# EAGLE board microzed_sd_v0.3 (EAGLE 6.5.4)
REVISION: R1.0; VERSION: V0.3
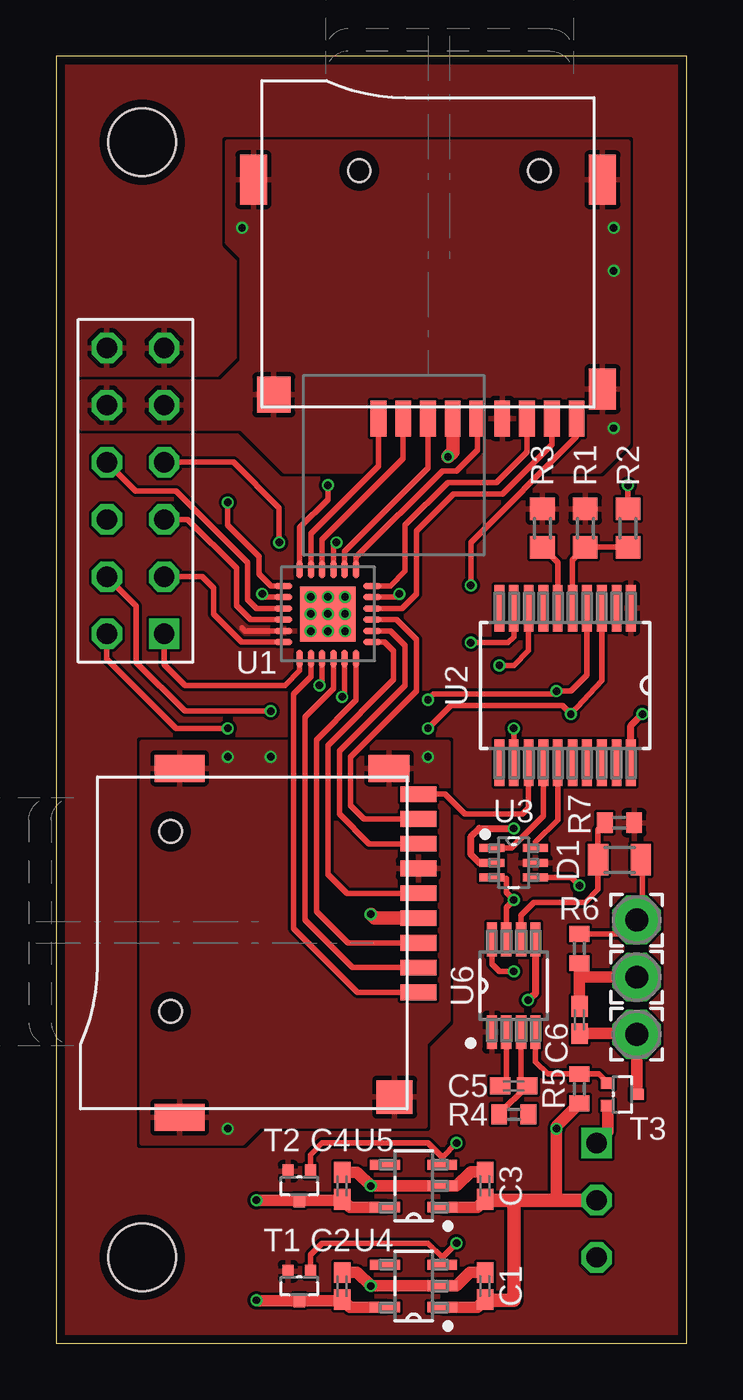
[diagram p0: board, top side]
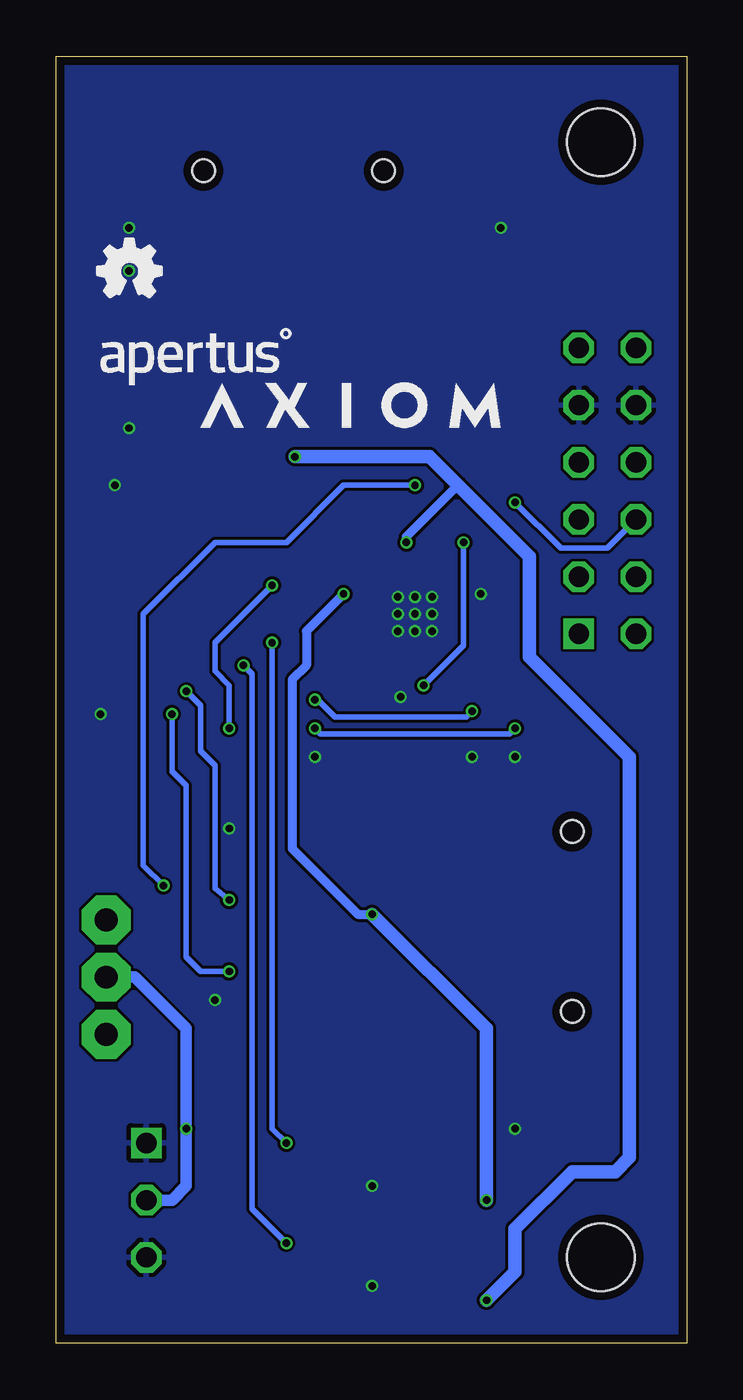
[diagram p1: board, bottom side, seen from below]

Size 28 x 57.15 mm. Coordinates in mm from the lower left corner, seen from the top.
Outline: 0,0 28,0 28,57.15 0,57.15 0,0
Copper layers (1+2*15+16): Top 0.035559375mm / dielectric 0.17018125mm / Route2 0.01778125mm / dielectric 47mil / Route15 0.0356mm / dielectric 0.2007mm / Bottom 0.0356mm
Design rules "LaenPCBOrder4L *": minimum track width 5mil, minimum drill 10mil, track to track 5mil, track to pad 5mil, pad to pad 5mil, via to via 5mil, smd to smd 5mil, copper to edge 15mil, drill to drill 5mil, minimum pad ring 4mil, minimum via ring 4mil, stop-mask expansion 4mil, vias tented up to drill 15mil, thermal gap 8mil
Net classes: 1 LVDS: width 0.305 mm, drill 0.305 mm, clearance 0.152 mm
Holes 3 mm at 3.81,3.81 3.81,53.34
tKeepout: area 1.3,1.3 to 6.3,6.3; area 1.3,50.8 to 6.3,55.8

## Footprints (pad centres in the part's own frame; a part is rotated, then mirrored left to right if it is on the bottom)
C0402K = smd 0.925 x 0.74: 1 -0.6,0; 2 0.6,0
MICROMELF-W = smd 0.9 x 1.4: A 0.95,0; C -0.95,0
2,15/1,0 = drill 1.016 pad 2.159 octagon: 1 0,0
R0603 = smd 1 x 1.1: 1 -0.85,0; 2 0.85,0
R0402 = smd 0.7 x 0.9: 1 -0.65,0; 2 0.65,0
SOT416 = smd 0.5 x 0.6: 1 -0.5,-0.65; 2 0.5,-0.65; 3 0,0.65
µZ-TOP-NOHOLES = drill 0.9 square: J5-1 4.79,31.5; JP4-1 24,8.89 | drill 0.9 octagon: J5-2 4.79,34.04; J5-3 4.79,36.58; J5-4 4.79,39.12; J5-5 4.79,41.66; J5-6 4.79,44.2; J5-7 2.25,31.5; J5-8 2.25,34.04; J5-9 2.25,36.58; J5-10 2.25,39.12; J5-11 2.25,41.66; J5-12 2.25,44.2; JP4-2 24,6.35; JP4-3 24,3.81
S-PWQFN-N24 = smd 0.78 x 0.28: 1 -1.975,1.25; 2 -1.975,0.75; 3 -1.975,0.25; 4 -1.975,-0.25; 5 -1.975,-0.75; 6 -1.975,-1.25; 13 1.975,-1.25; 14 1.975,-0.75; 15 1.975,-0.25; 16 1.975,0.25; 17 1.975,0.75; 18 1.975,1.25 | smd 0.28 x 0.78: 7 -1.25,-1.975; 8 -0.75,-1.975; 9 -0.25,-1.975; 10 0.25,-1.975; 11 0.75,-1.975; 12 1.25,-1.975; 19 1.25,1.975; 20 0.75,1.975; 21 0.25,1.975; 22 -0.25,1.975; 23 -0.75,1.975; 24 -1.25,1.975 | smd 2.45 x 2.45: EPAD 0,0
SOP65P780X200-20N = smd 2.057 x 0.432: 1 -3.429,2.921; 2 -3.429,2.286; 3 -3.429,1.626; 4 -3.429,0.965; 5 -3.429,0.33; 6 -3.429,-0.33; 7 -3.429,-0.965; 8 -3.429,-1.626; 9 -3.429,-2.286; 10 -3.429,-2.921; 11 3.429,-2.921; 12 3.429,-2.286; 13 3.429,-1.626; 14 3.429,-0.965; 15 3.429,-0.33; 16 3.429,0.33; 17 3.429,0.965; 18 3.429,1.626; 19 3.429,2.286; 20 3.429,2.921
SOT65P210X110-6N = smd 1.118 x 0.356: 1 -0.965,0.66; 2 -0.965,0; 3 -0.965,-0.66; 4 0.965,-0.66; 5 0.965,0; 6 0.965,0.66
SOT95P275X110-5N = smd 1.321 x 0.457: 1 -1.27,0.94; 2 -1.27,0; 3 -1.27,-0.94; 4 1.27,-0.94; 5 1.27,0.94
SOP65P490X110-8N = smd 1.499 x 0.457: 1 -2.057,0.965; 2 -2.057,0.33; 3 -2.057,-0.33; 4 -2.057,-0.965; 5 2.057,-0.965; 6 2.057,-0.33; 7 2.057,0.33; 8 2.057,0.965
TF-MICRO-SD_PP3 = smd 0.7 x 1.6: 1 2.2,11; 2 1.1,11; 3 0,11; 4 -1.1,11; 5 -2.2,11; 6 -3.3,11; 7 -4.4,11; 8 -5.5,11; CD -6.6,11 | smd 1.2 x 2.2: MT1 -7.75,0.4; MT2 7.75,0.4 | smd 1.2 x 1.8: MT3 -7.75,9.7 | smd 1.5 x 1.6: MT4 6.85,9.95 | hole 1: -4.95,0; 3.05,0

## Placement (x,y rotation side)
C1  1µ  [C0402K]  19.05,2.54 90 top
C2  1µ  [C0402K]  12.7,2.54 90 top
C3  1µ  [C0402K]  19.05,6.99 90 top
C4  1µ  [C0402K]  12.7,6.99 90 top
C5  2n2  [C0402K]  20.32,11.43 180 top
C6  1µ  [C0402K]  23.24,14.35 270 top
D1  [MICROMELF-W]  25.02,21.46 180 top
LOGO1  OSHW_LOGO_FILLX0100-NT  [OSHW_FILLX100_NOTEXT]  26.16,46.48 0 bottom
PAD1  WIREPAD2,15/1,0  [2,15/1,0]  25.78,13.72 0 top
PAD2  WIREPAD2,15/1,0  [2,15/1,0]  25.78,16.26 0 top
PAD3  WIREPAD2,15/1,0  [2,15/1,0]  25.78,18.8 0 top
R1  [R0603]  23.5,36.2 90 top
R2  [R0603]  25.4,36.2 270 top
R3  10k  [R0603]  21.59,36.2 90 top
R4  100R  [R0402]  20.32,10.16 0 top
R5  2k2  [R0402]  23.24,11.3 90 top
R6  10k  [R0402]  23.24,17.53 90 top
R7  10k  [R0402]  25.02,23.11 180 top
T1  PMR670UPE  [SOT416]  10.79,2.54 180 top
T2  PMR670UPE  [SOT416]  10.79,6.99 180 top
T3  PMR290UNE  [SOT416]  25.15,11.05 270 top
U0  µZ-PMOD-NOHOLES  [µZ-TOP-NOHOLES]  0,0 0 top
U1  TXS02612  [S-PWQFN-N24]  12.06,32.38 0 top
U2  MCP23009-E/SS  [SOP65P780X200-20N]  22.61,29.21 270 top
U3  74LVC1G98DW-7  [SOT65P210X110-6N]  20.32,21.34 0 top
U4  LD6836TD/30P  [SOT95P275X110-5N]  15.88,2.54 180 top
U5  LD6836TD/30P  [SOT95P275X110-5N]  15.88,6.99 180 top
U6  EMC2101-ACZL  [SOP65P490X110-8N]  20.32,15.88 90 top
U$1  APERTUS_LOGO334X100  [APERTUS_LOGO_334X100]  26.04,42.55 0 bottom
U$13  AXIOM_LOGO525X80  [AXIOM_LOGO_525X80]  21.59,40.64 0 bottom
µSD0  MICRO-SD3  [TF-MICRO-SD_PP3]  16.51,52.07 180 top
µSD1  MICRO-SD3  [TF-MICRO-SD_PP3]  5.08,17.78 270 top

## Library data of the parts
C1-C6 R1-R7 = rcl
D1 = diode
LOGO1 = ohw-logo
PAD1-PAD3 = wirepad
T1-T3 = transistor
U0 = microzed
U1 = TXS02612
U2 = mcp23009
U3 = 74lvc1g98; MPN: 74LVC1G98DW-7; OC_FARNELL: 1893843; OC_NEWARK: 47T3929; PACKAGE: SOT-6; SUPPLIER: DIODES INC.
U4 U5 = ld6836; MPN: LD6836TD/30P; OC_FARNELL: 2308335; OC_NEWARK: 69W9605; PACKAGE: TSOP-5; SUPPLIER: NXP
U6 = emc2101; MPN: EMC2101-ACZL-TR; OC_FARNELL: 2361961; OC_NEWARK: 12X8574; PACKAGE: MSOP-8; SUPPLIER: MICROCHIP
U$1 U$13 = logos_apertus_axiom
µSD0 µSD1 = micro-sd

## Nets
A_CLK: U0.J5-4 U1.9
A_CMD: U0.J5-3 U1.4
A_DAT0: U0.J5-2 U1.6
A_DAT1: U0.J5-1 U1.7
A_DAT2: U0.J5-9 U1.1
A_DAT3: U0.J5-10 U1.3
B0_CLK: U1.19 µSD0.5
B0_CMD: U1.20 µSD0.3
B0_DAT0: U1.18 µSD0.7
B0_DAT1: U1.16 µSD0.8
B0_DAT2: U1.23 µSD0.1
B0_DAT3: U1.22 µSD0.2
B1_CLK: U1.13 µSD1.5
B1_CMD: U1.12 µSD1.3
B1_DAT0: U1.14 µSD1.7
B1_DAT1: U1.15 µSD1.8
B1_DAT2: U1.8 µSD1.1
B1_DAT3: U1.10 µSD1.2
CD0: U2.12 µSD0.CD
CD1: U2.13 µSD1.CD
FAN: C6.2 PAD1.1 T3.3
GND: C1.2 C2.2 C3.2 C4.2 R2.1 T3.2 U0.J5-5 U0.J5-11 U0.JP4-1 U0.JP4-3 U1.2 U1.11 U1.EPAD U2.20 U3.2 U4.2 U5.2 U6.5 µSD0.6 µSD0.MT1 µSD0.MT2 µSD0.MT3 µSD0.MT4 µSD1.6 µSD1.MT1 µSD1.MT2 µSD1.MT3 µSD1.MT4
N$1: U2.14 U3.1
N$2: U2.15 U3.6
N$3: R1.1 R2.2 U2.5
N$4: R3.1 U2.6
N$5: U2.16
N$6: U2.17
N$7: C5.2 U6.2
N$8: C5.1 R4.1 U6.3
N$9: R4.2
N$12: R5.2 T3.1 U6.4
N$13: D1.A R7.2 U6.6
PWR0: T1.1 U2.8 U4.3
PWR1: T2.1 U2.9 U5.3
SCL: U0.J5-7 U2.3 U6.8
SDA: U0.J5-8 U2.4 U3.3 U6.7
SEL: U1.24 U3.4
TACH: D1.C PAD3.1 R6.2
VCC: R1.2 R3.2 R7.1 T1.2 T2.2 U0.J5-6 U0.J5-12 U1.5 U2.1 U3.5 U6.1
VCC0: C2.1 T1.3 U1.21 U4.5 µSD0.4
VCC1: C4.1 T2.3 U1.17 U5.5 µSD1.4
VDD: C1.1 C3.1 C6.1 PAD2.1 R5.1 R6.1 U0.JP4-2 U4.1 U5.1

## Tracks (layer width: path | path; a pad name or v marks a point on that pad's centre or on a via)
A_CLK  (via drill 0.33)
  Top 0.254: U1.9 11.81,29.34 v11.68,29.21 | U0.J5-4 7.87,39.12 9.91,37.08 v9.91,35.56
  Bottom 0.254: v9.91,35.56 9.91,30.99 v11.68,29.21
A_CMD
  Top 0.254: U0.J5-3 5.84,36.58 8,34.42 8,32.77 8.63,32.13 U1.4
A_DAT0
  Top 0.254: U0.J5-2 6.47,34.04 6.99,33.53 6.99,32.38 8.23,31.14 U1.6
A_DAT1
  Top 0.254: U1.7 10.81,29.86 10.16,29.21 5.71,29.21 4.79,30.14 U0.J5-1
A_DAT2  (via drill 0.33)
  Top 0.254: U1.1 9.54,33.63 9.02,34.16 9.02,34.92 7.62,36.32 v7.62,37.34
  Bottom 0.254: U0.J5-9 3.52,35.31 5.59,35.31 v7.62,37.34
A_DAT3
  Top 0.254: U0.J5-10 3.52,37.85 5.33,37.85 8.51,34.67 8.51,33.02 8.89,32.63 U1.3
B0_CLK
  Top 0.254: U1.19 13.31,34.91 17.14,38.73 17.78,38.73 18.71,39.66 µSD0.5
B0_CMD
  Top 0.254: µSD0.3 16.51,38.86 12.81,35.17 U1.20
B0_DAT0
  Top 0.254: µSD0.7 20.91,39.58 19.56,38.23 17.4,38.23 15.49,36.32 15.49,34.29 14.84,33.63 U1.18
B0_DAT1
  Top 0.254: µSD0.8 22.01,39.92 19.81,37.72 17.65,37.72 16,36.07 16,33.27 15.36,32.63 U1.16
B0_DAT2
  Top 0.254: µSD0.1 14.31,38.95 11.31,35.95 U1.23
B0_DAT3
  Top 0.254: µSD0.2 15.41,39.29 11.81,35.69 U1.22
B1_CLK
  Top 0.254: µSD1.5 12.91,19.98 12.06,20.83 12.06,26.54 14.99,29.46 14.99,30.73 14.59,31.14 U1.13
B1_CMD
  Top 0.254: µSD1.3 12.95,17.78 11.56,19.18 11.56,26.8 13.31,28.55 U1.12
B1_DAT0
  Top 0.254: µSD1.7 13.89,22.18 12.57,23.5 12.57,26.29 15.49,29.21 15.49,30.99 14.85,31.64 U1.14
B1_DAT1
  Top 0.254: µSD1.8 13.68,23.28 13.08,23.88 13.08,26.04 16,28.96 16,31.24 15.11,32.13 U1.15
B1_DAT2
  Top 0.254: µSD1.1 13.38,15.58 10.54,18.41 10.54,28.83 11.31,29.6 U1.8
B1_DAT3
  Top 0.254: µSD1.2 13.16,16.68 11.05,18.8 11.05,27.81 12.31,29.08 U1.10
CD0  (via drill 0.33)
  Top 0.254: U2.12 v20.32,27.3 | v18.41,33.66 18.41,35.56 23.11,40.26 µSD0.CD
  Bottom 0.254: v20.32,27.3 20.32,29.21 20.95,29.84 20.95,31.11 v18.41,33.66
CD1
  Top 0.254: µSD1.CD 17.28,24.38 18.16,23.5 20.7,23.5 20.98,23.77 U2.13
FAN
  Top 0.254: 25.75,13.75 PAD1.1 | 25.78,11.06 T3.3
  Top 0.508: C6.2 25.75,13.75 | PAD1.1 25.78,11.06
GND  (via drill 0.33)
  Top 0.254: U1.11 12.81,28.82 v12.7,28.7 | U1.2 9.28,33.13 v9.14,33.27 | 12.94,31.51 v12.83,31.62 | R2.1 v25.4,38.1
  Top 0.305: U2.20 25.53,27.43 v26.04,27.94 | U3.2 18.8,21.34 18.43,21.7 18.43,22.49 18.8,22.86 v20.32,22.86 | U6.5 21.29,15.54 v20.95,15.24
  Top 0.508: C1.2 18.38,3.14 17.78,2.54 U4.2 v13.97,2.54 13.37,3.14 C2.2 | C3.2 19.02,7.62 18.41,7.62 17.78,6.99 U5.2 v13.97,6.99 13.37,7.58 C4.2 | T3.2 24.5,9.39 U0.JP4-1
  other vias: 16.51,26.04 9.53,26.04 7.62,9.53 7.62,26.04 24.77,49.53 24.77,47.62 24.77,40.64 11.3,33.15 12.06,32.38 11.3,32.38 11.3,31.62 12.06,31.62 12.06,33.15 12.83,32.38 12.83,33.15 8.26,49.53
  pour Bottom: 0,57.15 27.94,57.15 27.94,0 0,0
  pour Top (rank 2): 3.81,26.67 17.4,26.67 17.4,14.35 16.38,13.34 16.38,9.65 9.02,9.65 8.26,8.89 3.81,8.89
  pour Top (rank 2): 25.4,53.34 25.4,40.01 24.13,38.73 10.16,38.73 8.26,40.64 1.14,40.64 1.14,42.67 7.37,42.67 8.26,43.56 8.26,48.26 7.62,48.9 7.62,53.34
N$1
  Top 0.254: U2.14 21.64,23.42 20.22,22 U3.1
N$2
  Top 0.254: U2.15 22.28,23.24 21.29,22.25 U3.6
N$3
  Top 0.254: U2.5 22.94,34.79 R1.1 R2.2
N$4
  Top 0.254: U2.6 22.28,34.66 R3.1
N$7
  Top 0.254: U6.2 19.99,11.7 C5.2
N$8
  Top 0.254: U6.3 20.65,11.7 C5.1 19.67,10.18 R4.1
N$12
  Top 0.254: U6.4 21.29,12.5 21.83,11.95 R5.2 24.09,11.95 T3.1
N$13
  Top 0.254: U6.6 20.65,19 21.22,19.57 23.5,19.57 24.07,20.15 D1.A 24.07,22.81 R7.2
PWR0  (via drill 0.33)
  Top 0.254: U2.8 20.98,30.76 20.32,30.1 v19.68,30.1 | v17.78,4.45 17.14,3.81 | 17.14,3.81 U4.3 | T1.1 11.29,3.93 11.81,4.45 16.51,4.45 17.14,3.81
  Bottom 0.254: v19.68,30.1 19.3,29.72 19.3,5.97 v17.78,4.45
PWR1  (via drill 0.33)
  Top 0.254: U2.9 20.32,31.37 20.07,31.11 v18.41,31.11 | v17.78,8.89 17.14,8.26 | 17.14,8.26 U5.3 | T2.1 11.29,8.37 11.81,8.89 16.51,8.89 17.14,8.26
  Bottom 0.254: v18.41,31.11 18.41,9.53 v17.78,8.89
SCL  (via drill 0.33)
  Top 0.254: U0.J5-7 2.25,30.39 5.33,27.3 v7.62,27.3 | v16.51,27.3 17.53,28.32 22.48,28.32 v22.86,27.94 24.23,29.44 U2.3 | U6.8 19.36,16.84 19.68,16.51 v20.32,16.51
  Bottom 0.254: v7.62,27.3 7.87,27.05 16.26,27.05 v16.51,27.3 | v22.86,27.94 22.86,25.4 22.23,24.77 22.23,17.14 21.59,16.51 v20.32,16.51
SDA  (via drill 0.33)
  Top 0.254: v9.53,28.07 5.71,28.07 3.56,30.23 3.56,32.73 U0.J5-8 | v16.51,28.57 16.76,28.83 22.1,28.83 v22.23,28.96 22.86,28.96 23.57,29.67 U2.4 | U6.7 19.99,19.36 v20.32,19.68 19.99,20.02 19.99,20.65 U3.3
  Bottom 0.254: v9.53,28.07 9.78,27.81 15.62,27.81 16.38,28.57 v16.51,28.57 | v22.23,28.96 21.59,28.32 21.59,26.29 20.95,25.65 20.95,20.19 v20.32,19.68
SEL  (via drill 0.33)
  Top 0.254: U1.24 10.81,36.22 12.06,37.47 v12.06,38.1 | U3.4 22.89,20.68 v23.24,20.32
  Bottom 0.254: v12.06,38.1 15.24,38.1 17.78,35.56 20.95,35.56 24.13,32.38 24.13,21.21 v23.24,20.32
TACH
  Top 0.254: R6.2 25.03,18.18 PAD3.1 26.04,19.05 26.04,21.4 D1.C
VCC
  Top 0.254: U1.5 8.37,31.64 8.26,31.75
  pour Top (rank 3): 0,57.15 27.94,57.15 27.94,0 0,0
VCC0  (via drill 0.33)
  Top 0.254: v12.45,35.56 12.31,35.43 U1.21
  Top 0.508: U4.5 13.04,1.6 C2.1 12.65,1.89 T1.3 8.9,1.89 v8.89,1.91
  Top 0.61: µSD0.4 17.61,39.58 v17.4,39.37
  Bottom 0.406: v12.45,35.56 12.45,35.81 10.16,38.1
  Bottom 0.61: v17.4,39.37 11.43,39.37 10.16,38.1 6.99,34.92 6.99,30.48 2.54,26.04 2.54,8.26 3.17,7.62 5.08,7.62 7.62,5.08 7.62,3.17 v8.89,1.91
VCC1  (via drill 0.33)
  Top 0.254: U1.17 15.1,33.13 v15.24,33.27
  Top 0.508: U5.5 13.04,6.04 C4.1 12.65,6.33 T2.3 8.9,6.33 v8.89,6.35
  Top 0.61: v13.97,19.05 14.14,18.88 µSD1.4
  Bottom 0.406: v15.24,33.27 16.89,31.62 16.89,30.1 17.53,29.46 17.53,21.97 14.61,19.05 v13.97,19.05
  Bottom 0.61: v8.89,6.35 8.89,13.97 v13.97,19.05
VDD  (via drill 0.33)
  Top 0.508: U5.1 18.71,6.04 C3.1 | U4.1 18.71,1.6 C1.1 | C6.1 23.24,16.26 | 23.24,16.26 R6.1 | 22.23,6.35 v22.23,9.53 22.23,9.64 R5.1 | PAD2.1 23.24,16.26
  Top 0.61: U0.JP4-2 22.23,6.35 20.32,6.35 | 20.32,6.35 19.09,6.35 C3.1 | 20.32,6.35 20.32,1.91 19.09,1.91 C1.1
  Bottom 0.508: PAD2.1 24.51,16.26 22.23,13.97 v22.23,9.53 22.23,6.99 22.86,6.35 U0.JP4-2

## Text on the board
_bSilk: PMOD SD/FAN ADAPTER | Copyright (C) 2014 H.Poetzl / Licensed under CERN OHL v.1.1